# Altium PCB IND_ENC_v1r0.PcbDoc
Units mil, origin at the board's own origin, x right, y up, seen from the top; angles counter-clockwise.
Board outline 1283.94 x 2362.18 mil, 4 copper layers (Top Layer, GND, Signal Layer 2, Bottom Layer), stack 30.634 mil thick; 66 components, 41 nets, 211 pads, 57 vias.
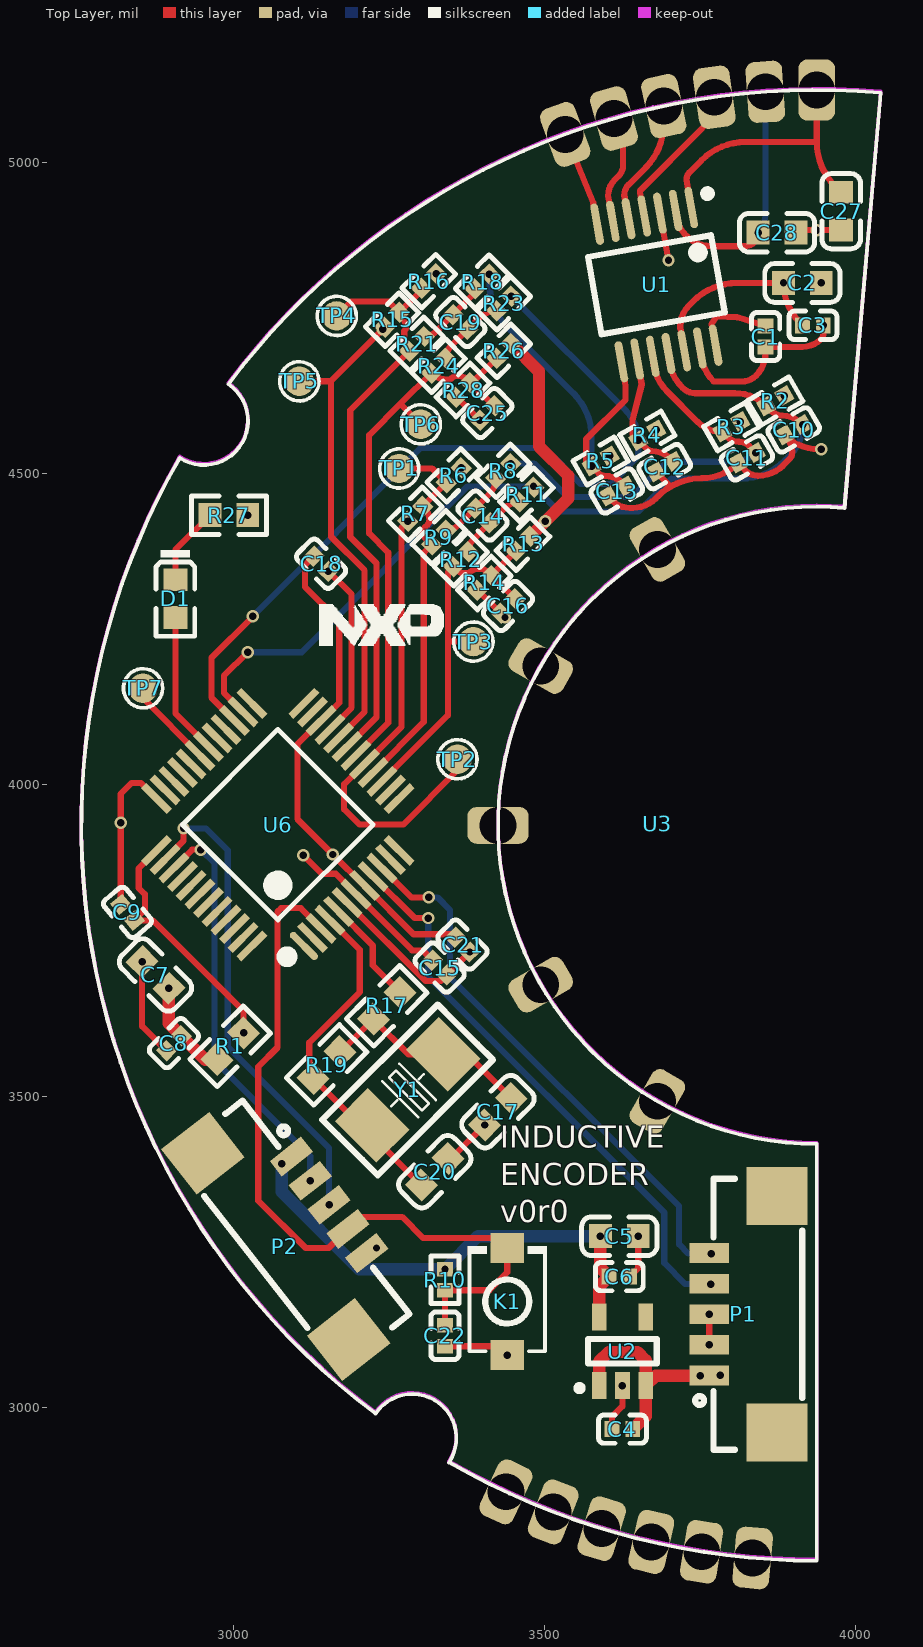
[diagram p0: Top Layer view]
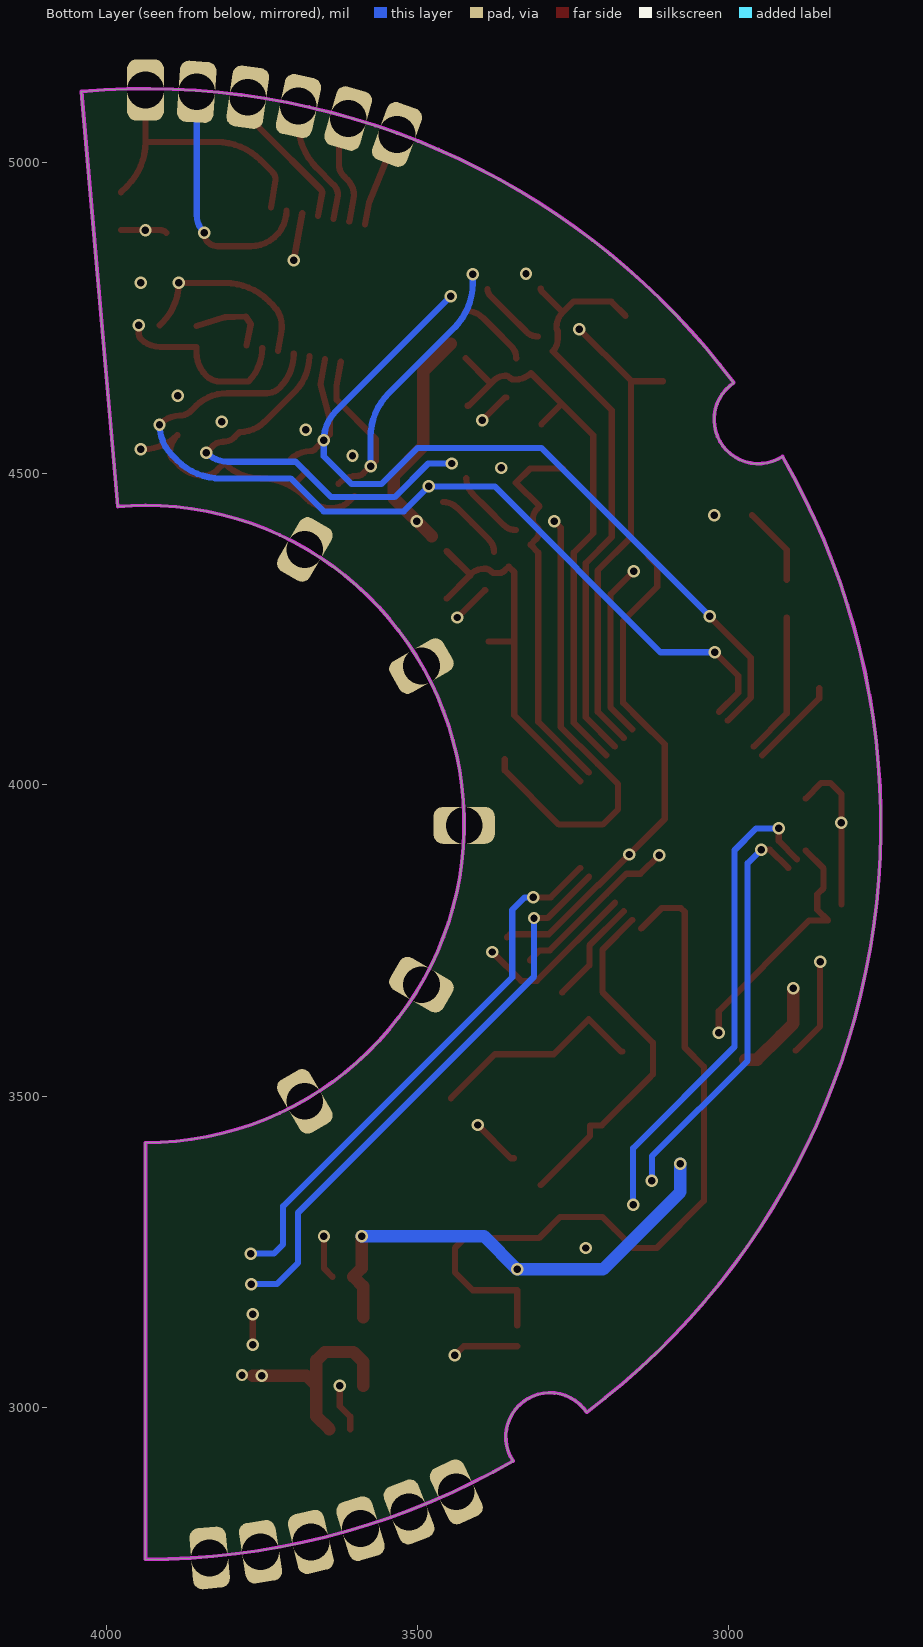
[diagram p1: Bottom Layer view, seen from below]
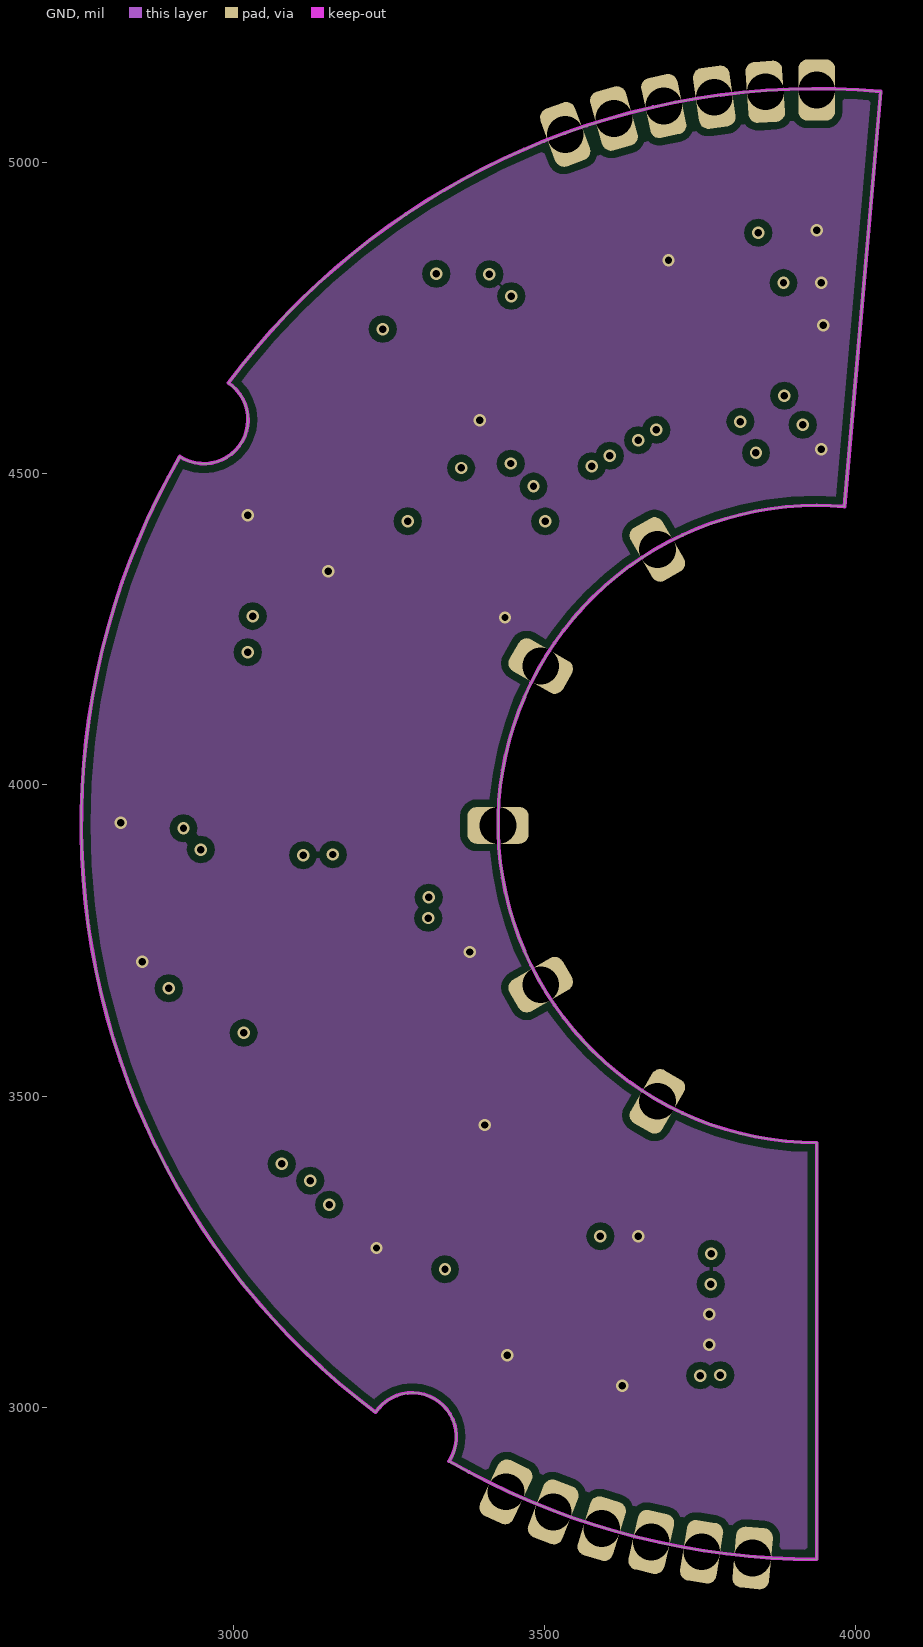
[diagram p2: GND]
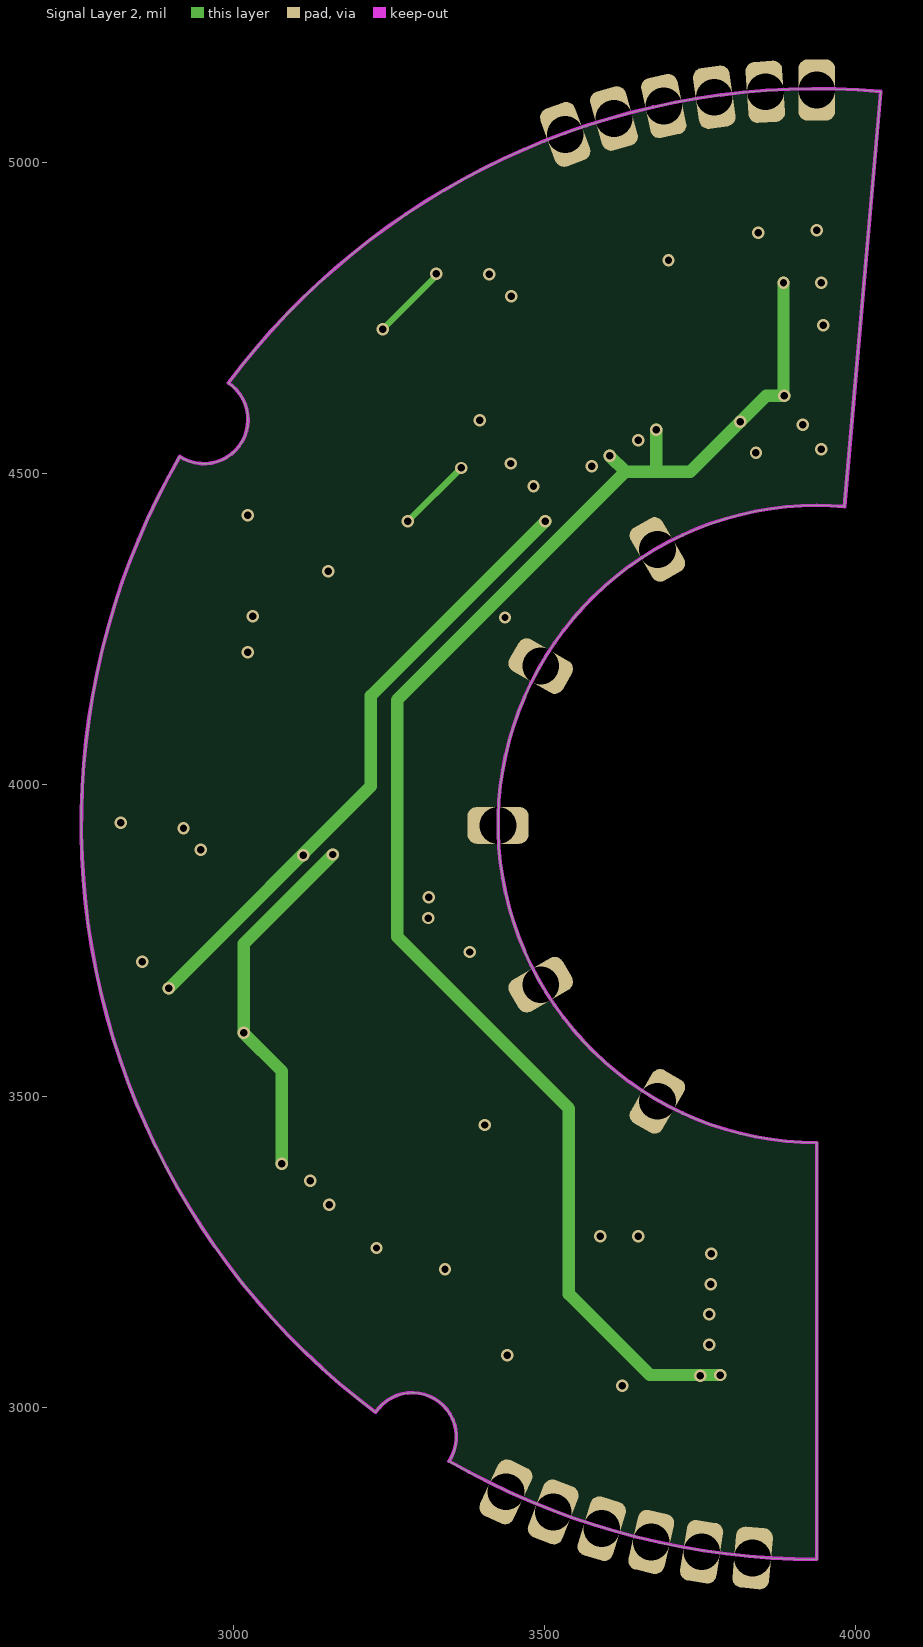
[diagram p3: Signal Layer 2]
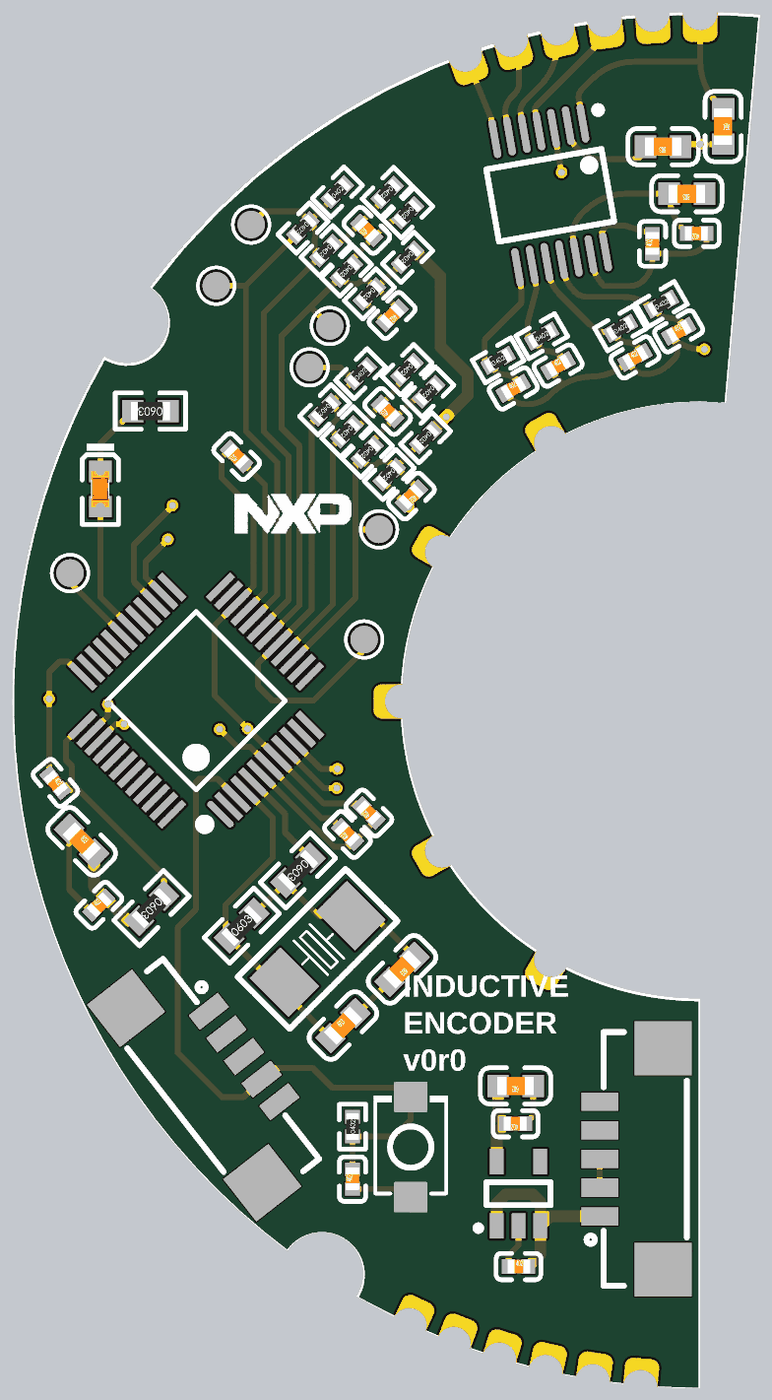
[diagram p4: 3D render of the assembled board from above, using the file's embedded part models]

## Layer stack, top to bottom
Top Solder: solder mask 0.4, Solder Resist, Dk 3.5
Top Layer: signal copper 1.4
Dielectric 1: core 10, FR-4, Dk 4.2
GND: signal copper 1.417
Dielectric 3: prepreg 5, Dk 4.2
Signal Layer 2: signal copper 1.417
Dielectric 2: core 10, Dk 4.2
Bottom Layer: signal copper 1.4
Bottom Solder: solder mask 0.4, Solder Resist, Dk 3.5

## Board outline
3228.44,2991.82 cw(c3287.4,2952.51) 3346.37,2913.2 3346.69,2913.76 ccw(c3937.01,3936.76) 3937.01,2755.66 3937.01,3424.95 cw(c3937.01,3936.76) 3937.01,4448.57 cw(c3937.01,3936.76) 3981.62,4446.62 4039.95,5113.37 ccw(c3937.01,3936.76) 3533.05,5046.63 ccw(c3937.01,3936.76) 2992.13,4645.42 2992.07,4645.33 cw(c2952.76,4586.37) 2913.99,4527.04 2913.95,4526.98 ccw(c3937.01,3936.76)

## Design rules (kind name [scope] priority, off if disabled: settings)
Clearance Clearance_1 [InPolygon] p1: gap=12 ignorepadtopadclearanceinfootprint=TRUE
Clearance [NOT(InComponent('U1'))] p2: gap=7 ignorepadtopadclearanceinfootprint=TRUE
ComponentClearance [All] p1 off: gap=10 collisioncheckmode=3 verticalgap=10 showdistances=FALSE
Height [All] p1 off: minheight=0 maxheight=1000 prefheight=500
HoleSize [All] p1 off: absolutevalues=TRUE maxlimit=100 minlimit=1 maxpercent=80.000 minpercent=20.000
HoleToHoleClearance [All] p1 off: gap=10 allowstackedmicrovias=TRUE
LayerPairs [All] p1 off: enforce=TRUE
MinimumSolderMaskSliver [All] p1 off: minsoldermaskwidth=10
NetAntennae [All] p1 off: netantennaetolerance=0
PolygonConnect [All] p1: thpad.connectstyle=Relief thpad.reliefconductorwidth=10 thpad.reliefentries=4 thpad.polygonreliefangle="90 Angle" thpad.airgapwidth=10 smdpad.connectstyle=Relief smdpad.reliefconductorwidth=10 smdpad.reliefentries=4 smdpad.polygonreliefangle="90 Angle" smdpad.airgapwidth=10 via.connectstyle=Direct via.reliefconductorwidth=10 via.reliefentries=4 via.polygonreliefangle="90 Angle" via.airgapwidth=10
RoutingVias [All] p1: holewidth=28 width=50 viastyle="Through Hole" minholewidth=28 minwidth=50 maxholewidth=28 maxwidth=50
SilkToSilkClearance [All] p1 off: silktosilkclearance=10
SilkToSolderMaskClearance [IsPad] p1 off: minsilkscreentomaskgap=10 clearancetoexposedcopper=TRUE
SolderMaskExpansion [All] p1: expansion=4
Width [All] p1: maxlimit=1000 minlimit=10 preferedwidth=10
21 further rules are at their usual default settings.

## Components (designator, comment, footprint, x,y, rotation, side; value= is the part's Value field where it differs from the comment)
C1 "100nF (104) 10% 16V" 0402_C 3855,4720 r90 top
C2 "4.7uF (475) 10% 16V" 0603_C 3914,4806 r180 top
C3 "100nF (104) 10% 16V" 0402_C 3931,4738 r180 top
C4 "100nF (104) 10% 16V" 0402_C 3625,2965 r0 top
C5 "10uF (106) 10% 10V" 0603_C 3620,3275 r180 top
C6 "100nF (104) 10% 16V" 0402_C 3620,3210 r180 top
C7 "10uF (106) 10% 10V" 0603_C 2875,3694.6 r315 top
C8 "100nF (104) 10% 16V" 0402_C 2904.54,3585 r45 top
C9 "100nF (104) 10% 16V" 0402_C 2830,3795 r310 top
C10 "4.7nF (472) 10% 50V" 0402_C 3900,4570 r30 top
C11 "4.7nF (472) 10% 50V" 0402_C 3825,4525 r30 top
C12 "4.7nF (472) 10% 50V" 0402_C 3693,4511 r30 top
C13 "4.7nF (472) 10% 50V" 0402_C 3616,4471.83 r30 top
C14 "100pF (101) 5% 50V" 0402_C 3400.34,4432.34 r135 top
C15 "100nF (104) 10% 16V" 0402_C 3331.44,3706.44 r135 top
C16 "1nF (102) 10% 50V" 0402_C 3441.17,4287.17 r225 top
C17 "20pF (200) 5% 50V" 0603_C 3425,3475 r225 top
C18 "100nF (104) 10% 16V" 0402_C 3141,4355 r135 top
C19 "100pF (101) 5% 50V" 0402_C 3364.61,4743.17 r135 top
C20 "20pF (200) 5% 50V" 0603_C 3323.56,3378.56 r45 top
C21 "100nF (104) 10% 16V" 0402_C 3368.17,3743.27 r135 top
C22 "100nF (104) 10% 16V" 0402_C 3340,3115 r90 top
C25 "1nF (102) 10% 50V" 0402_C 3408,4597 r225 top
C27 "1.2nF (122) 10% 50V" 0603_C 3976.38,4921.26 r270 top
C28 "1.2nF (122) 10% 50V" 0603_C 3873.23,4886.72 r180 top
D1 "红灯 0603" 0603_LED_S1 2907,4299 r270 top
K1 "TS-1088" SW-SMD_L3.9-W3.0-P4.45 3440,3170 r90 top
P1 "Header 7" CONN-MX1.25-5P_SMD_L 3818.9,3149.61 r90 top
P2 "Header 7" CONN-MX1.25-5P_SMD_L 3111,3292 r308 top
R1 "0Ω (0R0) ±1%" 0603_R 2995,3580 r225 top
R2 "6.8KΩ (6801) ±1%" 0402_R 3870.51,4616.63 r30 top
R3 "6.8KΩ (6801) ±1%" 0402_R 3800,4575 r30 top
R4 "6.8KΩ (6801) ±1%" 0402_R 3665,4561.63 r30 top
R5 "6.8KΩ (6801) ±1%" 0402_R 3590,4520 r30 top
R6 "20KΩ (2002) ±1%" 0402_R 3354,4497 r45 top
R7 "10KΩ (1002) ±1%" 0402_R 3292.17,4435.17 r225 top
R8 "100Ω (1000) ±1%" 0402_R 3433.61,4504.17 r225 top
R9 "15KΩ (1502) ±1%" 0402_R 3330.34,4397.34 r225 top
R10 "10KΩ (1002) ±1%" 0402_R 3340,3205 r90 top
R11 "100Ω (1000) ±1%" 0402_R 3471,4466 r225 top
R12 "15KΩ (1502) ±1%" 0402_R 3365.34,4362.34 r225 top
R13 "20KΩ (2002) ±1%" 0402_R 3465.34,4387.34 r225 top
R14 "10KΩ (1002) ±1%" 0402_R 3403.17,4324.17 r225 top
R15 "20KΩ (2002) ±1%" 0402_R 3255,4747 r225 top
R16 "10KΩ (1002) ±1%" 0402_R 3314,4809 r45 top
R17 "0Ω (0R0) ±1%" 0603_R 3246.34,3645 r225 top
R18 "100Ω (1000) ±1%" 0402_R 3399.61,4808.17 r225 top
R19 "1MΩ (1004) ±1%" 0603_R 3149.69,3550 r45 top
R21 "15KΩ (1502) ±1%" 0402_R 3294.61,4708.17 r225 top
R23 "100Ω (1000) ±1%" 0402_R 3434.6,4773.17 r225 top
R24 "15KΩ (1502) ±1%" 0402_R 3329.61,4673.17 r225 top
R26 "20KΩ (2002) ±1%" 0402_R 3434.6,4696.87 r225 top
R27 "1KΩ (1001) ±1%" 0603_R 2993,4433 r180 top
R28 "10KΩ (1002) ±1%" 0402_R 3369,4634 r225 top
TP1 "TP?" TPP 3266.44,4508 r0 top
TP2 "TP?" TPP 3360,4041 r0 top
TP3 "TP?" TPP 3385.5,4230 r0 top
TP4 "TP?" TPP 3166,4753 r0 top
TP5 "TP?" TPP 3106,4648 r0 top
TP6 "TP?" TPP 3301,4579 r0 top
TP7 "TP?" TPP 2855,4155 r0 top
U1 "AS5715R" TSSOP-14 3679.49,4803.15 r190 top
U2 "TPL730_3V3" SOT-23-5 3625,3090 r270 top
U3 "IE101" IE101 3937.01,3937.01 r0 top
U6 "MCXA34x" LQFP48 3070.87,3936.76 r135 top
Y1 "8MHz" SMD_5032_2P 3280,3510 r45 top

## Footprints (in the part's own frame and the unit in brackets; to place one, negate y for a bottom-side part, rotate by r counter-clockwise, add the part's x,y. Pads: shape width x height; smd on the part's side, far side on the other; paste and mask are expansions set on the pad)
0402_C [mm]
  rect 0.6x0.65 smd mask+0.051: 1(-0.425,0) 2(0.425,0)
  silkscreen extent -0.97,-0.58 0.97,0.58, body extent -0.48,-0.3 0.52,0.3, height 0.2
0402_R [mm]
  rect 0.6x0.65 smd mask+0.051: 1(-0.425,0) 2(0.425,0)
  silkscreen extent -0.97,-0.58 0.97,0.58, body extent -0.57,-0.27 0.58,0.28, height 0.41
0603_C [mm]
  rect 0.93x0.98 smd: 1(-0.77,0) 2(0.77,0)
  silkscreen extent -1.53,-0.79 1.54,0.79, body extent -0.8,-0.4 0.8,0.4, height 0.3
0603_LED_S1 [mm]
  rect 0.93x0.98 smd: A(0.77,0) K(-0.77,0)
  silkscreen extent -1.98,-0.79 1.54,0.79, body extent -0.8,-0.4 0.8,0.4, height 0.6
0603_R [mm]
  rect 0.93x0.98 smd: 1(-0.77,0) 2(0.77,0)
  silkscreen extent -1.53,-0.79 1.54,0.79, body extent -0.85,-0.4 0.85,0.4, height 0.56
CONN-MX1.25-5P_SMD_L [mm] "立贴"
  rect 0.8x1.62 smd paste+0 mask+0.05: 1(-2.5,1.38) 2(-1.25,1.38) 3(0,1.38) 4(1.25,1.38) 5(2.5,1.38)
  rect 2.35x2.5 smd paste+0 mask+0.05: 6(4.825,-1.38) 7(-4.825,-1.38)
  silkscreen extent -5.53,-2.42 5.53,1.96
IE101 [mm]
  rrect50% 1.5x2.5 hole 1.5: 1(0,29.943)
  rrect50% 2.5x1.5 hole 1.5 rot 94: 2(-2.093,29.87)
  rrect50% 2.5x1.5 hole 1.5 rot 98: 3(-4.175,29.651)
  rrect50% 2.5x1.5 hole 1.5 rot 102: 4(-6.237,29.287)
  rrect50% 2.5x1.5 hole 1.5 rot 106: 5(-8.269,28.781)
  rrect50% 2.5x1.5 hole 1.5 rot 110: 6(-10.261,28.134)
  rrect50% 2.5x1.5 hole 1.5 rot 65: 7(-12.679,-27.246)
  rrect50% 2.5x1.5 hole 1.5 rot 69: 8(-10.751,-28.064)
  rrect50% 2.5x1.5 hole 1.5 rot 73: 9(-8.771,-28.746)
  rrect50% 2.5x1.5 hole 1.5 rot 77: 10(-6.749,-29.288)
  rrect50% 2.5x1.5 hole 1.5 rot 81: 11(-4.693,-29.688)
  rrect50% 2.5x1.5 hole 1.5 rot 85: 12(-2.615,-29.943)
  rrect50% 2.5x1.5 hole 1.5 rot 60: 13(-6.5,-11.315)
  rrect50% 2.5x1.5 hole 1.5 rot 30: 14(-11.258,-6.557)
  rrect50% 2.5x1.5 hole 1.5: 15(-13,-0.057)
  rrect50% 2.5x1.5 hole 1.5 rot 150: 16(-11.258,6.443)
  rrect50% 2.5x1.5 hole 1.5 rot 120: 17(-6.5,11.201)
  silkscreen extent -30,-30.06 2.61,29.94
LQFP48 [mm]
  oval 1.5x0.3 smd: 1(-4.275,2.75)
  rect 1.5x0.3 smd: 2(-4.275,2.25) 3(-4.275,1.75) 4(-4.275,1.25) 5(-4.275,0.75) 6(-4.275,0.25) 7(-4.275,-0.25) 8(-4.275,-0.75) 9(-4.275,-1.25) 10(-4.275,-1.75) 11(-4.275,-2.25) 12(-4.275,-2.75) 25(4.225,-2.75) 26(4.225,-2.25) 27(4.225,-1.75) 28(4.225,-1.25) 29(4.225,-0.75) 30(4.225,-0.25) 31(4.225,0.25) 32(4.225,0.75) 33(4.225,1.25) 34(4.225,1.75) 35(4.225,2.25) 36(4.225,2.75)
  rect 0.3x1.5 smd: 13(-2.775,-4.25) 14(-2.275,-4.25) 15(-1.775,-4.25) 16(-1.275,-4.25) 17(-0.775,-4.25) 18(-0.275,-4.25) 19(0.225,-4.25) 20(0.725,-4.25) 21(1.225,-4.25) 22(1.725,-4.25) 23(2.225,-4.25) 24(2.725,-4.25) 37(2.725,4.25) 38(2.225,4.25) 39(1.725,4.25) 40(1.225,4.25) 41(0.725,4.25) 42(0.225,4.25) 43(-0.275,4.25) 44(-0.775,4.25) 45(-1.275,4.25) 46(-1.775,4.25) 47(-2.275,4.25) 48(-2.775,4.25)
  silkscreen extent -4.3,-2.75 2.72,3.75, body extent -3.53,-3.5 3.47,3.5, height 1.6
SMD_5032_2P [mm] "贴片晶振"
  rect 1.9x2.4 smd: 1(-2.05,0) 2(2.05,0)
  silkscreen extent -3.32,-1.6 3.33,1.6
SOT-23-5 [mm]
  rect 1.1x0.6 smd: 1(1.4,-0.95) 2(1.4,0) 3(1.4,0.95) 4(-1.4,0.95) 5(-1.4,-0.95)
  silkscreen extent -0.5,-1.87 1.62,1.4
SW-SMD_L3.9-W3.0-P4.45 [mm]
  rect 1.23x1.36 smd paste+0.051 mask+0: 1(-2.185,0) 2(2.185,0)
  silkscreen extent -2.03,-1.62 2.25,1.62
TPP [mm]
  round 1.2 smd: 1(0,0)
  silkscreen extent -0.8,-0.8 0.8,0.8
TSSOP-14 [mm]
  oval 0.32x1.7 smd: 1(-1.95,-2.85) 2(-1.3,-2.85) 3(-0.65,-2.85) 4(0,-2.85) 5(0.65,-2.85) 6(1.3,-2.85) 7(1.95,-2.85) 8(1.95,2.85) 9(1.3,2.85) 10(0.65,2.85) 11(0,2.85) 12(-0.65,2.85) 13(-1.3,2.85) 14(-1.95,2.85)
  silkscreen extent -2.85,-3.45 2.55,1.6

## Part data
C1 C3 C4 C6 C8 C9 C15 C18 C21 C22: library part "0402 100nF (104) 10% 16V", "贴片电容", Package=0402, SuppliersPartNumber=C1525, ComponentLink1Description=供应商, ComponentLink1URL=http://www.szlcsc.com/product/details_1877.html, Supplier=LC
C2: library part "0603 4.7uF (475) 10% 16V", "贴片电容", Package=0603, SuppliersPartNumber=C19666, ComponentLink1Description=供应商, ComponentLink1URL=http://www.szlcsc.com/product/details_20375.html, Supplier=LC
C5 C7: library part "0603 10uF (106) 10% 10V", "贴片电容", Package=0603, SuppliersPartNumber=C19702, ComponentLink1Description=供应商, ComponentLink1URL=http://www.szlcsc.com/product/details_20411.html, Supplier=LC
C10 C11 C12 C13: library part "0402 4.7nF (472) 10% 50V", "贴片电容", Package=0402, SuppliersPartNumber=C1538, ComponentLink1Description=供应商, ComponentLink1URL=http://www.szlcsc.com/product/details_1890.html, Supplier=LC
C14 C19: library part "0402 100pF (101) 5% 50V", "贴片电容", Package=0402, SuppliersPartNumber=C1546, ComponentLink1Description=供应商, ComponentLink1URL=http://www.szlcsc.com/product/details_1898.html, Supplier=LC
C16 C25: library part "0402 1nF (102) 10% 50V", "贴片电容", Package=0402, SuppliersPartNumber=C1523, ComponentLink1Description=供应商, ComponentLink1URL=http://www.szlcsc.com/product/details_1875.html, Supplier=LC
C17 C20: library part "0603 20pF (200) 5% 50V", "贴片电容", Package=0603, SuppliersPartNumber=C1648, ComponentLink1Description=供应商, ComponentLink1URL=http://www.szlcsc.com/product/details_2000.html, Supplier=LC
C27 C28: library part "0603 1.2nF (122) 10% 50V", "贴片电容", Package=0603, SuppliersPartNumber=C30615, ComponentLink1Description=供应商, ComponentLink1URL=http://www.szlcsc.com/product/details_31372.html, Supplier=LC
D1: library part "0603 红灯", "发光二极管", Package=0603, SuppliersPartNumber=C2286, ComponentLink1Description=供应商, ComponentLink1URL=http://www.szlcsc.com/product/details_2659.html, Supplier=LC
K1: library part Key_2P, "贴片2脚按键"
P1 P2: "Header, 7-Pin", LatestRevisionDate=17-Jul-2002, LatestRevisionNote="Re-released for DXP Platform.", Publisher="Altium Limited"
R1 R17: library part "0603 0Ω (0R0) 1%", "贴片电阻", Package=0603, SuppliersPartNumber=C21189, ComponentLink1Description=供应商, ComponentLink1URL=http://www.szlcsc.com/product/details_21903.html, Supplier=LC
R2 R3 R4 R5: library part "0402 6.8KΩ (6801) 1%", "贴片电阻", Package=0402, SuppliersPartNumber=C25917, ComponentLink1Description=供应商, ComponentLink1URL=http://www.szlcsc.com/product/details_26660.html, Supplier=LC
R6 R13 R15 R26: library part "0402 20KΩ (2002) 1%", "贴片电阻", Package=0402, SuppliersPartNumber=C25765, ComponentLink1Description=供应商, ComponentLink1URL=http://www.szlcsc.com/product/details_26508.html, Supplier=LC
R7 R10 R14 R16 R28: library part "0402 10KΩ (1002) 1%", "贴片电阻", Package=0402, SuppliersPartNumber=C25744, ComponentLink1Description=供应商, ComponentLink1URL=http://www.szlcsc.com/product/details_26487.html, Supplier=LC
R8 R11 R18 R23: library part "0402 100Ω (1000) 1%", "贴片电阻", Package=0402, SuppliersPartNumber=C25076, ComponentLink1Description=供应商, ComponentLink1URL=http://www.szlcsc.com/product/details_25819.html, Supplier=LC
R9 R12 R21 R24: library part "0402 15KΩ (1502) 1%", "贴片电阻", Package=0402, SuppliersPartNumber=C25756, ComponentLink1Description=供应商, ComponentLink1URL=http://www.szlcsc.com/product/details_26499.html, Supplier=LC
R19: library part "0603 1MΩ (1004) 1%", "贴片电阻", Package=0603, SuppliersPartNumber=C22935, ComponentLink1Description=供应商, ComponentLink1URL=http://www.szlcsc.com/product/details_23662.html, Supplier=LC
R27: library part "0603 1KΩ (1001) 1%", "贴片电阻", Package=0603, SuppliersPartNumber=C21190, ComponentLink1Description=供应商, ComponentLink1URL=http://www.szlcsc.com/product/details_21904.html, Supplier=LC
TP1 TP2 TP3 TP4 TP5 TP6 TP7: library part "Test Point"
U1: "AMS"
U2: library part TPL730
U3: "INC_ENC_CIRCUIT"
U6: library part MCXA34xVLF, "LQFP48"
Y1: library part Crystal, "晶振"

## Via types
v1: diameter 20, hole 12, Top Layer to Bottom Layer, 57 vias

## Nets (pads, with @x,y where several pads share a name; then routed paths per layer and width w, separated by ;. In a path a pad name is that pad's centre, name@x,y a point inside that pad or via, vN(x,y) a via of type N, cw(c..) or ccw(c..) an arc to the next point about the centre after c; other vN are vias at no path point)
3.3V: C5.2 C6.2 C9.2 C18.2 C21.2 P2.1 R1.1 R10.2 U2.5 U6.8 U6.22 U6.37 | length 2570.8
  Top Layer w10: U6.37 2848,3865.59 2848,3834 2858,3824 2858,3799.43 C9.2 2870.82,3782.18 3016.44,3636.56 v1(3016.44,3601.44) ; C18.2 3115,4352.66 3115,4318.17 3170,4263.17 3170,4131.92 U6.22 3103,4064.92 3103,3945 v1(3160,3888) 3209.38,3838.62 U6.8 3289.39,3760 3351.44,3760 C21.2
  Top Layer w20: U2.5 3587.6,3194.33 C6.2 3589.68,3223.58 v1(3589.68,3275)
  Signal Layer 2 w20: v1(3078,3391) 3078,3539.87 v1(3016.44,3601.44) 3016.44,3744.44 v1(3160,3888)
  Bottom Layer w20: v1(3078,3391) 3078,3346 3202.27,3221.73 v1(3340,3221.73) 3393.27,3275 v1(3589.68,3275)
3.3V_ENC: C1.2 U1.14 | length 130.2
  Top Layer w10: U1.14 3768,4740 3776,4752 3809,4751 C1.2
3.3VA: C7.2 C8.2 C15.2 R1.2 R13.1 R26.1 U6.7 | length 1808.1
  Top Layer w10: v1(3112,3887) 3142,3857 3164.55,3857 U6.7 3287.55,3734 3303.88,3734 C15.2
  Top Layer w20: v1(2896.44,3673.17) 2896.44,3616.77 C8.2 2954.64,3558.56 R1.2 ; R26.1 3491,4664.14 3491,4543.37 3538,4496.37 3538,4460 R13.1
  Signal Layer 2 w20: v1(2896.44,3673.17) 3221,3997.73 3221,4143 v1(3501,4423)
5V: C2.2 C3.2 C4.2 P1.1 R2.2 R3.2 R4.2 R5.2 U1.12 U2.1 U2.3 | length 3144.2
  Top Layer w10: U1.12 3718,4733 3718,4736.2 cw(c3765.8,4736.2) 3732,4770 3738.71,4776.71 cw(c3809.42,4706) 3809.42,4806 v1(3883.68,4806) ccw(c3974.02,4806) 3910.14,4742.12 C3.2
  Top Layer w20: U2.1 3587.6,3073.6 3603,3089 3649,3089 3662.4,3075.6 U2.3 ; C4.2 3662.4,2985.67 U2.3 ; P1.1 v1(3750,3051.18) 3678.7,3051.18 U2.3
  Signal Layer 2 w20: v1(3604.49,4528.37) 3629.86,4503 ; v1(3679.49,4570) 3679.49,4503.51 3680,4503 ; v1(3782,3052) 3669,3052 3539,3182 3539,3480 3263,3756 3263,4136.14 3629.86,4503 ; v1(3883.68,4806) 3883.68,4626.31 v1(3885,4625) 3856.12,4625 v1(3814.49,4583.37) 3734.12,4503 3680,4503 ; 3629.86,4503 3680,4503
AGND: C1.1 C2.1 C3.1 C4.1 C5.1 C6.1 C7.1 C8.1 C9.1 C10.1 C11.1 C12.1 C13.1 C15.1 C16.2 C17.2 C18.1 C20.2 C21.1 C22.1 C25.2 C27.2 C28.1 K1.1 P1.2 P1.3 P2.5 R14.2 R27.1 R28.2 U1.3 U1.13 U2.2 U6.6 U6.21 U6.36 | length 2376.7
  Top Layer w10: C9.1 2819.24,3985.24 2837,4003 2851.51,4003 U6.36 ; v1(2853.56,3716.04) 2853.56,3612.31 C8.1 ; v1(3152.83,4343.17) 3190,4306 3190,4124.08 U6.21 ; U6.6 3308.71,3685 3333.56,3685 v1(3380,3731.44) ; C22.1 3425.71,3098.27 v1(3440,3083.98) ; C20.2 3350,3400 v1(3403.56,3453.56) ; R28.2 3359.17,4622.17 v1(3396.17,4585.17) ; R14.2 3392.34,4312.34 C16.2 ; C13.1 3608.57,4456.4 ccw(c3636.73,4484.56) 3636.73,4444.74 3641.66,4444.74 ccw(c3641.66,4496.85) 3678.51,4460 3681.69,4463.18 cw(c3752.08,4392.8) 3752.08,4492.34 ccw(c3752.08,4574.75) 3810.35,4516.47 C11.1 3822.2,4504.95 ccw(c3842.91,4525.66) 3842.91,4496.37 ccw(c3842.91,4553.18) 3883.08,4513.01 3893.53,4523.45 ccw(c3883.62,4533.37) 3897.64,4533.37 ccw(c3858.67,4533.37) C10.1@3886.23,4560.92 ; C4.1 3608.27,2985.27 3625,3002 v1(3625,3034.88) ; C6.1 3650.32,3223.58 v1(3650.32,3275) ; C12.1 3700.19,4480.96 cw(c3697.62,4478.38) 3701.25,4478.38 ; U1.3 v1(3698.97,4842.52) ; U1.13 ccw(c3825.47,4701.54) 3771.67,4647.73 3817.11,4647.73 ccw(c3817.11,4679.38) 3839.49,4657 ccw(c3802.05,4694.44) 3855,4694.44 C1.1 3913.89,4703.27 ccw(c3913.89,4746.3) 3944.32,4715.87 ccw(c3936.07,4724.12) 3947.73,4724.12 v1(3947.73,4738) ; v1(3764.57,3100.4) v1(3764.57,3149.61) ; C28.1 cw(c3913.74,4876.53) 3913.74,4890.94 C27.2 ; v1(3944.32,4538.99) 3940.19,4538.99 cw(c3940.19,4616.31) C10.1@3886.23,4560.92 ; C10.1@3886.23,4560.92 cw(c3940.19,4616.31) C10.1 C10.1@3886.23,4560.92
  other v1: 3230,3256.02 2819.24,3939 3436.4,4268.68 3023.31,4433 3944.32,4806 3937.01,4890.94
DIR_485: U6.13
EXTAL: R17.1 U6.5 | length 171.3
  Top Layer w10: U6.5 3224,3741.87 3224,3710.21 R17.1
I2C_SCL: U6.2
I2C_SDA: U6.1
LED_R: D1.A U6.30 | length 229.4
  Top Layer w10: D1.A 2907,4114.55 U6.30
NetC14_1: C14.1 R11.2 R12.1 | length 119.2
  Top Layer w10: R12.1 cw(c3404.54,4374.17) 3385.19,4393.52 C14.1 3436.4,4444.74 cw(c3459.17,4421.97) R11.2
NetC14_2: C14.2 R8.2 R9.1 | length 120.1
  Top Layer w10: R9.1 ccw(c3342.17,4436.54) 3361.52,4417.18 C14.2 3411.25,4466.91 ccw(c3385.83,4492.34) R8.2
NetC17_1: C17.1 R17.2 R19.2 Y1.2 | length 349.6
  Top Layer w10: R19.2 3172.77,3571.44 R17.2 3281.39,3567.07 Y1.2 3375.8,3567.07 C17.1
NetC19_1: C19.1 R23.2 R24.1 | length 116.7
  Top Layer w10: R24.1 cw(c3368.82,4685) 3349.46,4704.35 C19.1 3394.9,4749.79 cw(c3422.77,4721.92) R23.2
NetC19_2: C19.2 R18.2 R21.1 | length 114.8
  Top Layer w10: R21.1 ccw(c3306.44,4747.37) 3325.8,4728.02 C19.2 3383.3,4785.52 ccw(c3372.48,4796.34) R18.2
NetD1_K: D1.K R27.2 | length 126.8
  Top Layer w10: D1.K 2907,4377.32 R27.2
NetTP7_1: TP7.1 U6.31 | length 145.4
  Top Layer w10: TP7.1 2855,4138.71 U6.31
NetU1_4: U1.4 U3.3 | length 237.4
  Top Layer w10: U1.4 3653,4951 cw(c3660.24,4951) 3655.12,4956.12 3750.91,5051.91 ccw(c3698.44,5104.37) U3.3
NetU1_5: U1.5 U3.4 | length 202.4
  Top Layer w10: U1.5 3628,4947 cw(c3652.14,4947) 3635.07,4964.07 3662.17,4991.17 ccw(c3591.46,5061.88) 3691.46,5061.88 U3.4
NetU1_6: U1.6 U3.5 | length 177.3
  Top Layer w10: U1.6 3602,4946 cw(c3638.21,4946) 3612.61,4971.61 3618.93,4977.93 ccw(c3601.86,4995) 3626,4995 3626,5035.01 ccw(c3576.35,5035.01) U3.5
NetU1_7: U1.7 U3.6 | length 153.8
  Top Layer w10: U3.6 3578,4935 U1.7
OPA0_INN: R6.1 R7.1 R9.2 TP1.1 U6.16 | length 617
  Top Layer w10: U6.16 3306,4100.88 3306,4373 R9.2 3309.94,4394.07 cw(c3321.87,4406) 3305,4406 cw(c3317.07,4406) 3308.54,4414.54 3312,4418 ccw(c3304.76,4425.24) 3315,4425.24 3315,4426 ccw(c3290.86,4426) 3307.93,4443.07 R7.1 R6.1 3319.34,4508 TP1.1
OPA0_INP: C16.1 R12.2 R13.2 R14.1 TP3.1 U6.15 | length 612.6
  Top Layer w10: U6.15 3344.76,4111.8 3344.76,4231 ; TP3.1 3345.76,4230 3344.76,4231 ; C16.1 3416.71,4335.29 ccw(c3415,4333.59) R14.1 cw(c3417.41,4336) R14.1@3415.71,4337.71 ; R13.2 R14.1@3415.71,4337.71 ; 3344.76,4231 3344.76,4341.76 R12.2 3359.78,4344.23 ccw(c3370,4354.46) 3370,4340 3376.17,4340 ccw(c3376.17,4346.83) 3380.99,4341.99 3381.76,4342.76 cw(c3392,4332.51) 3392,4347 3393.27,4347 cw(c3393.27,4315.27) R14.1@3415.71,4337.71
OPA0_OUT: R6.2 R7.2 TP2.1 U6.17 | length 872.1
  Top Layer w10: v1(3280.34,4423.34) 3270,4413 3270,4092.72 U6.17 3178,4000.72 3178,3960.85 3202.85,3936 3273,3936 3360,4023 TP2.1
  Signal Layer 2 w10: v1(3280.34,4423.34) v1(3365.83,4508.83)
OPA1_INN: R15.1 R16.1 R21.2 TP4.1 U6.19 | length 949.3
  Top Layer w10: TP4.1 3189,4776 3249.66,4776 R15.1 ; U6.19 3230,4108.4 3230,4356 3188,4398 3188,4601.56 R21.2 cw(c3302.32,4715.87) 3274.69,4715.87 3274.69,4728.71 ccw(c3269.11,4734.28) 3277,4734.28 ccw(c3242.28,4734.28) R15.1 ; R16.1 cw(c3294.93,4797.17) 3300.05,4792.05 R15.1
OPA1_INP: C25.1 R24.2 R26.2 R28.1 TP6.1 U6.18 | length 919.9
  Top Layer w10: U6.18 3249,4099.56 3249,4373 3218,4404 3218,4561.56 3269.72,4613.28 ; TP6.1 3269.72,4610.28 3269.72,4613.28 ; C25.1 cw(c3419.83,4613.66) 3416.42,4610.25 R28.1 ; R26.2 3385.5,4647.76 cw(c3380.83,4652.43) R28.1 ; 3269.72,4613.28 R24.2 ccw(c3342.74,4686.29) 3342.74,4651 3344.76,4651 ccw(c3344.76,4661.24) 3352,4654 cw(c3359.24,4646.76) 3359.24,4657 cw(c3359.24,4631.84) 3377.03,4649.63 R28.1
OPA1_OUT: R15.2 R16.2 TP5.1 U6.20 | length 911
  Top Layer w10: TP5.1 3156,4648 3157,4649 ; U6.20 3210.77,4117.01 3210.77,4344.23 3157,4398 3157,4649 ; R15.2 3157,4649
  Signal Layer 2 w10: v1(3240,4732) 3325.83,4817.83 v1(3325.83,4820.83)
OUT_COS_+: C12.2 R4.1 R23.1 U1.9 U6.27 | length 1524.5
  Top Layer w10: U6.27 2965,4140.06 2965,4204 3031,4270 v1(3031,4271) ; U1.9 3656,4643 3641,4586 3641,4562.78 v1(3650.51,4553.27) 3664.79,4538.99 ccw(c3672,4546.19) 3672,4536 cw(c3672,4490.48) C12.2@3704.19,4522.67
  Bottom Layer w10: v1(3031,4271) 3301,4541 3500,4541 3558,4483 3606,4483 3650.51,4527.51 v1(3650.51,4553.27) ccw(c3583.74,4553.27) 3630.95,4600.48 v1(3446.44,4785)
OUT_COS_-: C13.2 R5.1 R18.1 U1.8 | length 626.5
  Top Layer w10: U1.8 3630,4641 3630,4618.4 3567,4555.4 3567,4520.14 v1(3575.51,4511.63) 3587,4500.14 ccw(c3597,4510.14) 3597,4496 cw(c3597,4453.3) C13.2@3627.2,4483.49
  Bottom Layer w10: v1(3411.44,4820) 3411.44,4804.98 ccw(c3511.44,4804.98) 3440.73,4734.27 3546.22,4628.78 cw(c3475.51,4558.07) 3575.51,4558.07 v1(3575.51,4511.63)
OUT_SIN_+: C10.2 R2.1 R11.1 U1.11 U6.26 | length 1481.5
  Top Layer w10: U6.26 2985,4147.9 2985,4175 v1(3023,4213) ; U1.11 ccw(c3777.15,4692.65) 3721.87,4637.37 ccw(c3742.09,4657.59) 3742.09,4629 3805.97,4629 cw(c3805.97,4558.22) R2.1 3863.71,4600.58 ccw(c3882,4618.86) 3882,4593 cw(c3882,4549.89) 3912.48,4580.37 v1(3914.49,4578.37)
  Bottom Layer w10: v1(3023,4213) 3110,4213 3376.17,4479.17 v1(3482.17,4479.17) 3522.34,4439 3651,4439 3704,4492 3815.58,4492 ccw(c3815.58,4592) 3886.29,4521.29 3894.07,4529.07 ccw(c3844.78,4578.37) v1(3914.49,4578.37)
OUT_SIN_-: C11.2 R3.1 R8.1 U1.10 | length 685.2
  Top Layer w10: U1.10 ccw(c3754.33,4688.21) 3697.37,4631.24 3745.34,4583.27 ccw(c3785.51,4623.44) R3.1 3793.47,4558.68 ccw(c3812,4577.21) 3812,4551 cw(c3812,4527.2) 3828.83,4544.03 v1(3839.49,4533.37)
  Bottom Layer w10: v1(3445.44,4516) 3483,4516 3537,4462 3639,4462 3696,4519 3804.81,4519 ccw(c3804.81,4568.05) v1(3839.49,4533.37)
RESET: C22.2 K1.2 P2.4 R10.1 U6.3 | length 1243.5
  Top Layer w10: U6.3 3108.19,3802 3077,3802 3071,3796 3071,3578 3040,3547 3040,3332 3116,3256 3153.44,3256 P2.4 3203.44,3306 3271,3306 3305,3272 3424.02,3272 K1.2 3440,3217 3411.27,3188.27 R10.1 C22.2
RXD_485: U6.12
RXD_TTL: P1.4 U6.9 | length 915.9
  Top Layer w10: U6.9 3291.22,3786 v1(3313,3786)
  Bottom Layer w10: v1(3313,3786) 3313,3692 3692,3313 3692,3232 3726,3198 v1(3767,3198)
SWD_CLK: P2.2 U6.39 | length 660.2
  Top Layer w10: U6.39 2934.08,3896 v1(2948,3896)
  Bottom Layer w10: v1(2948,3896) 2970,3874 2970,3557 3123.52,3403.48 v1(3123.52,3364.23)
SWD_DIO: P2.3 U6.38 | length 784.3
  Top Layer w10: U6.38 2920,3909.75 v1(2920,3930)
  Bottom Layer w10: v1(2920,3930) 2956,3930 2991,3895 2991,3579 3153.81,3416.19 v1(3153.81,3325.45)
TXA: C27.1 U1.1 U3.1 | length 455
  Top Layer w10: U1.1 3728,4972 cw(c3744.9,4972) 3732.95,4983.95 3752.08,5003.08 cw(c3822.79,4932.37) 3822.79,5032.37 3937.01,5032.37 ; U3.1 3937.01,5032.37 ; C27.1 3966.3,4961.66 cw(c4037.01,5032.37) 3937.01,5032.37
TXB: C28.2 U1.2 U3.2 | length 407.1
  Top Layer w10: U1.2 ccw(c3767.95,4922.54) 3767.95,4865 3821.19,4865 ccw(c3821.19,4886.72) v1(3842.91,4886.72)
  Bottom Layer w10: v1(3842.91,4886.72) ccw(c3814.68,4914.95) 3854.61,4914.95 U3.2
TXD_485: U6.11
TXD_TTL: P1.5 U6.10 | length 885
  Top Layer w10: U6.10 3286.06,3819 v1(3314,3819)
  Bottom Layer w10: v1(3314,3819) 3328,3819 3348,3799 3348,3691 3716,3323 3716,3262 3731,3247 v1(3768,3247)
XTAL: C20.1 R19.1 U6.4 Y1.1 | length 565
  Top Layer w10: U6.4 3203,3735.03 3203,3667 3122,3586 3122,3534.81 R19.1 3203.88,3452.93 Y1.1 3222.93,3436.33 C20.1
pads on no net: P1.6 P1.7 P2.6 P2.7 U2.4 U3.7 U3.8 U3.9 U3.10 U3.11 U3.12 U3.13 U3.14 U3.15 U3.16 U3.17 U6.14 U6.23 U6.24 U6.25 U6.28 U6.29 U6.32 U6.33 U6.34 U6.35 U6.40 U6.41 U6.42 U6.43 U6.44 U6.45 U6.46 U6.47 U6.48

## Polygon pours and split planes (outlines as drawn)
AGND on GND "GND-AGND" (solid, remove dead copper, pour order 2): 2244.09,5511.81 4488.19,5511.81 4488.19,2519.68 2244.09,2519.68

## Keep-outs
Keep-Out Layer:
  lines w5.91: 2913.95,4527.23 ccw(c3937.01,3937.01) 3228.43,2992.06 cw(c3287.4,2952.76) 3346.37,2913.45 ; 2913.99,4527.29 ccw(c2952.76,4586.61) 2992.07,4645.58 ; 2992.13,4645.67 cw(c3937.01,3937.01) 3533.05,5046.88 cw(c3937.01,3937.01) 4039.95,5113.62 ; 3346.69,2914.01 ccw(c3937.01,3937.01) 3937.01,2755.91 3937.01,3425.2 cw(c3937.01,3937.01) 3937.01,4448.82 cw(c3937.01,3937.01) 3981.62,4446.87
  lines w6: 3981.62,4446.87 4039.95,5113.62

## Silkscreen, mask and mechanical layers (free items; w line width, h text height)
Top Overlay:
  drawing of 222 lines, arcs and shapes, not listed
  text "INDUCTIVE / ENCODER / v0r0" at 3429,3285 h60
Mechanical 1:
  lines w5.91: 2913.95,4526.98 ccw(c3937.01,3936.76) 3228.43,2991.81 cw(c3287.4,2952.51) 3346.37,2913.2 ; 2913.99,4527.04 ccw(c2952.76,4586.37) 2992.07,4645.33 ; 2992.13,4645.42 cw(c3937.01,3936.76) 3533.05,5046.63 cw(c3937.01,3936.76) 4039.95,5113.37 ; 3346.69,2913.76 ccw(c3937.01,3936.76) 3937.01,2755.66 3937.01,3424.95 cw(c3937.01,3936.76) 3937.01,4448.57 cw(c3937.01,3936.76) 3981.62,4446.62
  lines w6: 3981.62,4446.62 4039.95,5113.37